# EAGLE board alarm (EAGLE 9.5.2)
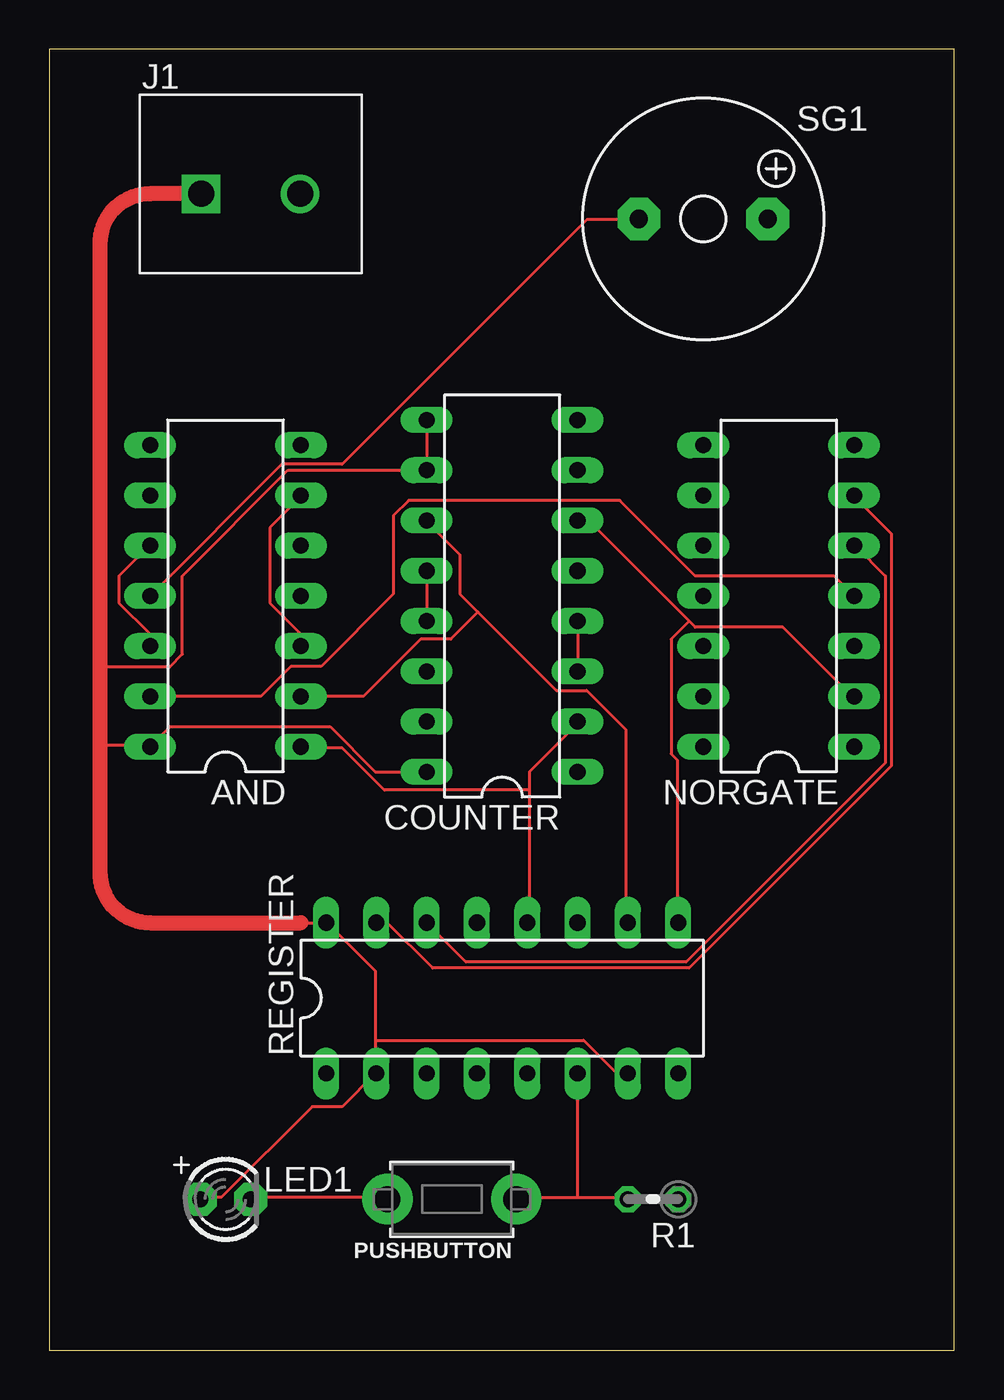
[diagram p0: board, top side]
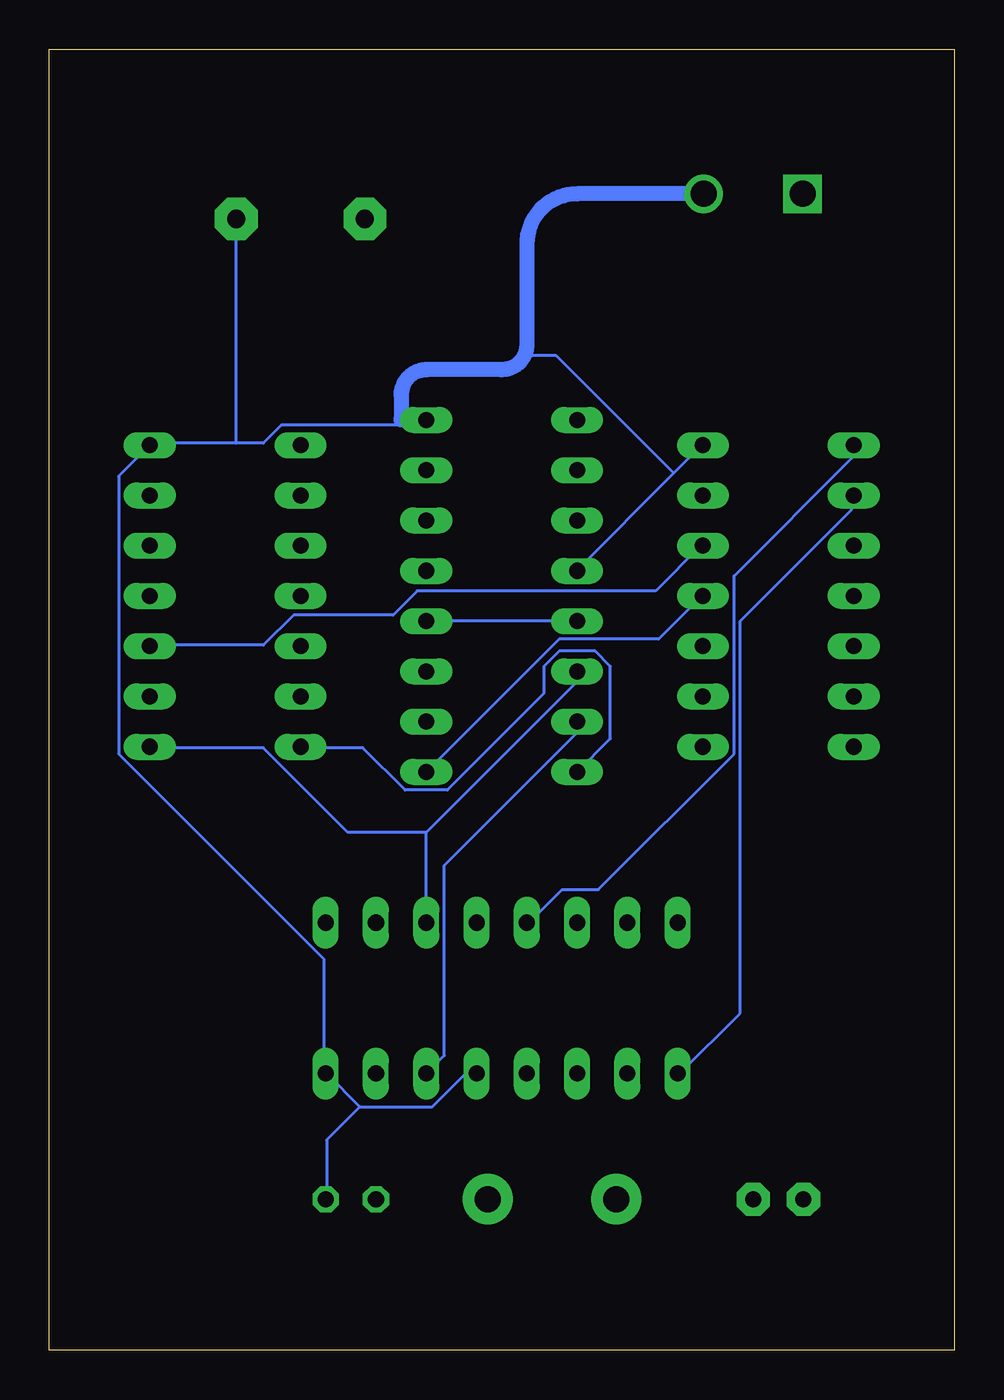
[diagram p1: board, bottom side, seen from below]

Size 45.7 x 65.71 mm. Coordinates in mm from the lower left corner, seen from the top.
Outline: 0,0 45.7,0 45.7,65.71 0,65.71 0,0
Copper layers (1*16): Top 0.035mm / dielectric 1.5mm / Bottom 0.035mm
Design rules "default": minimum track width 6mil, minimum drill 0.35mm, track to track 6mil, track to pad 6mil, pad to pad 6mil, via to via 6mil, smd to smd 6mil, copper to edge 40mil, drill to drill 6mil, minimum pad ring 10mil, minimum via ring 8mil, stop-mask expansion 4mil, vias tented up to drill 0mil, thermal gap 10mil

## Footprints (pad centres in the part's own frame; a part is rotated, then mirrored left to right if it is on the bottom)
DIL14 = drill 0.813 long: 1 -7.62,-3.81; 2 -5.08,-3.81; 3 -2.54,-3.81; 4 0,-3.81; 5 2.54,-3.81; 6 5.08,-3.81; 7 7.62,-3.81; 8 7.62,3.81; 9 5.08,3.81; 10 2.54,3.81; 11 0,3.81; 12 -2.54,3.81; 13 -5.08,3.81; 14 -7.62,3.81
DIL16 = drill 0.813 long: 1 -8.89,-3.81; 2 -6.35,-3.81; 3 -3.81,-3.81; 4 -1.27,-3.81; 5 1.27,-3.81; 6 3.81,-3.81; 7 6.35,-3.81; 8 8.89,-3.81; 9 8.89,3.81; 10 6.35,3.81; 11 3.81,3.81; 12 1.27,3.81; 13 -1.27,3.81; 14 -3.81,3.81; 15 -6.35,3.81; 16 -8.89,3.81
OST_OSTTA020161 = drill 1.3 square: 1 -2.5,0 | drill 1.3: 2 2.5,0
LED3MM = drill 0.813 pad 1.676 octagon: A -1.27,0; K 1.27,0
TACT_PANA-EVQ = drill 1.3 pad 2.54: P$1 -3.25,0; P$2 3.25,0
0204V = drill 0.813 octagon: 1 -1.27,0; 2 1.27,0
F/QMX = drill 0.914 pad 2.159 octagon: + 3.251,0; - -3.251,0

## Placement (x,y rotation side)
AND  4081N  [DIL14]  8.89,38.1 90 top
COUNTER  4029N  [DIL16]  22.86,38.1 90 top
J1  OSTTA020161  [OST_OSTTA020161]  10.16,58.42 0 top
LED1  RED  [LED3MM]  8.89,7.62 0 top
NORGATE  4001N  [DIL14]  36.83,38.1 90 top
PUSHBUTTON  [TACT_PANA-EVQ]  20.32,7.62 180 top
R1  200  [0204V]  30.48,7.62 180 top
REGISTER  4035N  [DIL16]  22.86,17.78 0 top
SG1  F/QMX  [F/QMX]  33.02,57.15 0 top

## Library data of the parts
AND COUNTER NORGATE REGISTER = 40xx
J1 = OSTTA020161; AVAILABILITY: Warning; DESCRIPTION: 2 Position Wire to Board Terminal Block Horizontal with Board 0.197 (5.00mm) Through Hole; MF: On Shore Technology Inc.; MP: OSTTA020161; PACKAGE: None; PRICE: None; PURCHASE-URL: https://pricing.snapeda.com/search/part/OSTTA020161/?ref=eda
LED1 PUSHBUTTON R1 = adafruit
SG1 = buzzer; OC_FARNELL: unknown; OC_NEWARK: unknown

## Nets
+5V: AND.14 COUNTER.9 COUNTER.10 COUNTER.16 J1.1 LED1.A NORGATE.14 REGISTER.2 REGISTER.7 REGISTER.16
CLOCK: COUNTER.15 PUSHBUTTON.P$1 R1.2 REGISTER.6
GND: AND.7 COUNTER.3 COUNTER.4 COUNTER.8 COUNTER.12 COUNTER.13 J1.2 NORGATE.7 R1.1 REGISTER.5 REGISTER.8 SG1.+
N$1: LED1.K PUSHBUTTON.P$2
N$2: AND.3 AND.6
N$3: AND.1 COUNTER.2 REGISTER.12
N$4: COUNTER.14 NORGATE.1 REGISTER.11
N$5: AND.2 COUNTER.11 REGISTER.10
N$6: COUNTER.6 NORGATE.2 REGISTER.9
N$7: AND.5 NORGATE.3
N$8: AND.8 REGISTER.13
N$9: AND.9 REGISTER.1
N$10: NORGATE.6 REGISTER.15
N$11: NORGATE.5 REGISTER.14
N$12: AND.10 AND.12
N$13: AND.13 NORGATE.4
N$14: AND.11 SG1.-
RES: AND.4 COUNTER.1

## Tracks (layer width: path | path; a pad name or v marks a point on that pad's centre or on a via)
+5V
  Top 0.152: 16.46,15.65 16.46,19.15 14.02,21.59 REGISTER.16 12.7,21.59 | 16.46,15.65 16.46,13.97 | REGISTER.7 28.65,13.97 26.98,15.65 16.46,15.65 | 16.46,13.97 14.78,12.29 13.26,12.29 8.69,7.72 7.62,7.72 LED1.A | 16.46,13.97 REGISTER.2 | COUNTER.9 COUNTER.10 12.04,44.45 6.71,39.12 6.71,35.15 6.1,34.54 2.54,34.54 | 2.54,30.58 5.03,30.58 AND.14 6.1,31.5 14.17,31.5 16.46,29.21 COUNTER.16
  Top 0.762: J1.1 5.08,58.42 arc90 2.54,55.88 2.54,34.54 2.54,30.58 2.54,24.13 arc90 5.08,21.59 12.7,21.59
  Bottom 0.152: COUNTER.16 17.37,30.89 17.37,34.54 18.14,35.31 19.96,35.31 20.73,34.54 20.73,33.17 25.6,28.3 27.74,28.3 29.87,30.43 32.92,30.43 NORGATE.14
CLOCK
  Top 0.152: 26.67,7.72 23.62,7.72 PUSHBUTTON.P$1 | 26.67,7.72 29.11,7.72 R1.2 | 26.67,7.72 REGISTER.6
  Bottom 0.152: COUNTER.15 19.05,31.19 25.76,24.49 25.76,14.88 REGISTER.6
GND
  Top 0.152: COUNTER.4 COUNTER.3 | COUNTER.12 COUNTER.13
  Bottom 0.152: REGISTER.5 24.69,13.97 26.37,12.29 30.02,12.29 | 30.02,12.29 31.7,13.97 REGISTER.8 31.85,13.97 31.85,19.76 42.21,30.12 42.21,44.14 NORGATE.7 40.54,45.82 36.27,45.82 | 30.02,12.29 31.7,10.62 31.7,7.72 R1.1 | 27.94,47.04 26.67,47.04 COUNTER.8 | 14.17,44.3 19.05,39.42 COUNTER.12 | 14.17,44.3 12.8,45.67 AND.7 | 14.17,44.3 20.12,50.24 21.34,50.24 21.67,50.36 | 36.27,45.82 34.9,45.82 33.98,46.74 28.19,46.74 27.94,46.99 | COUNTER.13 COUNTER.4 | 36.27,45.82 SG1.+
  Bottom 0.762: J1.2 19.05,58.42 arc-90 21.59,55.88 21.59,50.8 arc20 21.67,50.36 arc70 22.86,49.53 26.67,49.53 arc-90 27.94,48.26 27.94,47.04 27.94,46.99
N$1
  Top 0.152: LED1.K 10.21,7.72 17.07,7.72 PUSHBUTTON.P$2
N$2
  Top 0.152: AND.3 12.65,35.61 12.65,36.22 11.12,37.74 11.12,41.55 12.65,43.08 AND.6
N$3
  Top 0.152: 24.23,28.3 24.23,29.21 26.67,31.65 COUNTER.2 | 24.23,28.3 24.23,21.59 REGISTER.12 | 24.23,28.3 16.92,28.3 14.78,30.43 12.8,30.43 AND.1
N$4
  Bottom 0.152: COUNTER.14 19.05,33.78 26.67,26.16 | REGISTER.11 26.67,26.16 | 26.67,26.16 30.63,26.16 34.9,30.43 40.54,30.43 NORGATE.1
N$5
  Top 0.152: 21.64,37.29 20.73,38.2 20.73,40.18 19.05,41.86 COUNTER.11 | 21.64,37.29 25.6,33.33 27.13,33.33 29.11,31.34 29.11,21.59 REGISTER.10 | AND.2 15.85,33.02 18.74,35.92 20.27,35.92 21.64,37.29
N$6
  Top 0.152: 32.31,36.83 32.61,36.53 37.03,36.53 40.54,33.02 NORGATE.2 | 32.31,36.83 27.28,41.86 26.67,41.86 COUNTER.6 | 32.31,36.83 31.39,35.92 31.39,30.12 31.7,29.82 31.7,21.59 REGISTER.9
N$7
  Bottom 0.152: NORGATE.3 40.54,35.61 34.9,35.61 33.38,37.14 28.35,37.14 27.13,38.35 15.09,38.35 12.8,40.64 AND.5
N$8
  Bottom 0.152: AND.8 5.18,45.67 5.18,45.06 11.12,39.12 11.12,30.12 17.98,23.27 19.81,23.27 21.49,21.59 REGISTER.13
N$9
  Bottom 0.152: AND.9 5.18,43.08 5.18,42.47 10.82,36.83 10.82,17.02 13.87,13.97 REGISTER.1
N$10
  Top 0.152: REGISTER.15 17.07,21.59 19.35,19.3 32.31,19.3 42.52,29.52 42.52,41.25 40.69,43.08 NORGATE.6
N$11
  Top 0.152: REGISTER.14 21.03,19.61 32.16,19.61 42.21,29.67 42.21,39.12 40.69,40.64 NORGATE.5
N$12
  Top 0.152: AND.12 5.03,35.61 5.03,36.22 3.51,37.74 3.51,39.12 5.03,40.64 AND.10
N$13
  Top 0.152: AND.13 10.67,33.02 12.19,34.54 13.72,34.54 17.37,38.2 17.37,42.16 18.14,42.93 28.8,42.93 32.61,39.12 39.62,39.12 NORGATE.4
N$14
  Top 0.152: AND.11 11.73,44.75 14.78,44.75 27.13,57.1 29.72,57.1 SG1.-
RES
  Bottom 0.152: COUNTER.1 19.96,35.92 14.93,35.92 12.8,38.05 AND.4